# Altium PCB PCB1.PcbDoc (part 3 of 3)
Units mil, origin at the board's own origin, x right, y up, seen from the top; angles counter-clockwise.
Board outline 8343 x 1831 mil, 4 copper layers (Top Layer, VCC, GND, Bottom Layer); 375 components, 241 nets, 1575 pads, 601 vias.
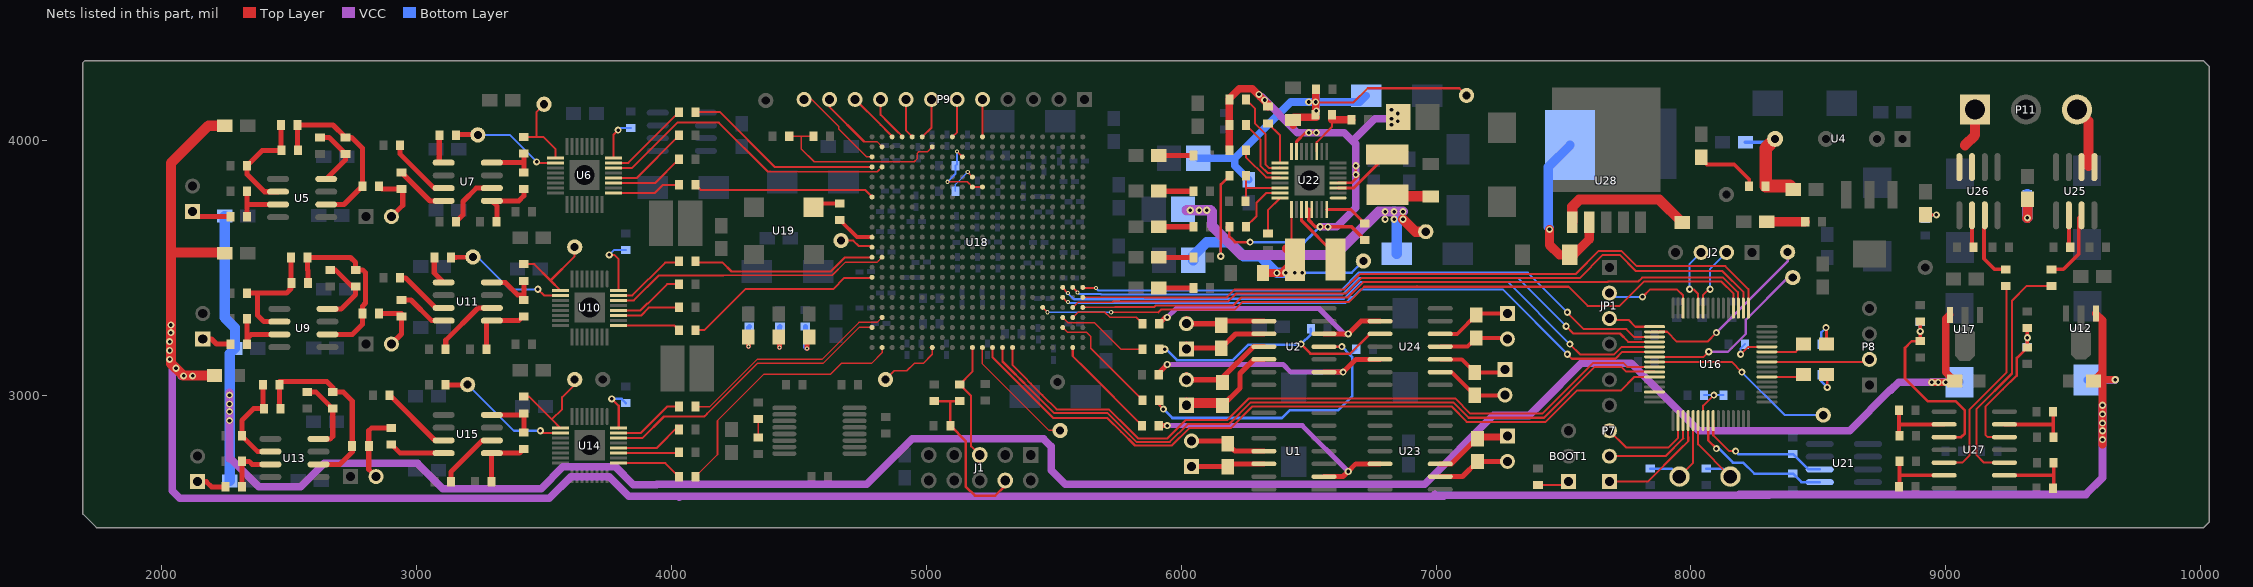
[diagram p5: the nets of this part, all layers, seen from the top]

## Via types
v1: diameter 28, hole 14, Top Layer to Bottom Layer, 286 vias
v2: diameter 16, hole 8, Top Layer to Bottom Layer, 238 vias
v3: diameter 24, hole 12, Top Layer to Bottom Layer, 70 vias
v4: diameter 196.85, hole 118.11, Top Layer to Bottom Layer, 6 vias
v5: diameter 50, hole 28, Top Layer to Bottom Layer, 1 vias

## Nets (pads, with @x,y where several pads share a name; then routed paths per layer and width w, separated by ;. In a path a pad name is that pad's centre, name@x,y a point inside that pad or via, vN(x,y) a via of type N, cw(c..) or ccw(c..) an arc to the next point about the centre after c; other vN are vias at no path point) (continued)
FPGA_TEST5: P9.5 U18.M22 | length 191.7
  Top Layer w8: U18.M22@5219.69,4013.39 5220,4013.7 5220,4085 ; 5220,4040 5220,4085 ; P9.5@5220,4160 5220,4085
FPGA_TEST6: P9.6 U18.J22 | length 154.2
  Top Layer w8: U18.J22@5101.57,4013.39 5120,4031.81 5120,4065 P9.6@5120,4160
FPGA_TEST7: P9.7 U18.F22 | length 161.7
  Top Layer w8: U18.F22@4983.46,4013.39 5020,4049.92 P9.7@5020,4160
FPGA_TEST8: P9.8 U18.E22 | length 156.6
  Top Layer w8: P9.8@4920,4160 4920,4060 4920,4037.48 U18.E22@4944.09,4013.39
FPGA_TEST9: P9.9 U18.D22 | length 234.7
  Top Layer w8: P9.9@4820,4160 4820,4100 4852.5,4067.5 ; 4890,4030 4852.5,4067.5 ; U18.D22@4904.72,4013.39 4904.72,4015.28 4852.5,4067.5
FPGA_TEST10: P9.10 U18.C22 | length 249.2
  Top Layer w8: P9.10@4720,4160 4820,4060 ; 4850,4030 4820,4060 ; U18.C22@4865.35,4013.39 4865.35,4014.65 4820,4060
FPGA_TEST11: P9.11 U18.B21 | length 300.6
  Top Layer w6: 4755,3995 4755.46,3994.54 4790,3994.54 4805.46,3994.54 U18.B21@4825.98,3974.02
  Top Layer w8: P9.11@4620,4160 4620,4130 4755,3995
FPGA_TEST12: P9.12 U18.A20 | length 368.6
  Top Layer w6: P9.12@4520,4160 4550,4160 4655,4055 4655,4045 4740,3960 4765,3935 ; 4767.77,3935 4765,3935 ; U18.A20@4786.61,3934.65 4765.35,3934.65 4765,3935
FPGA_TMS: J1.5 R76.1 U18.L1 | length 475.2
  Top Layer w8: U18.L1@5180.31,3186.61 5180.31,3091.81 R76.1@5130,3041.5 5175,2996.5 5175,2799 J1.5@5209,2765
GPS_TIMER: R103.2 U18.AA1 | length 419.5
  Top Layer w8: U18.AA1@5574.02,3186.61 5574.02,3152.52 5628.27,3098.27 R103.2@5846.54,2880
HMC5883_RDY: U16.62 | length 2.1
  Top Layer w8: U16.62@7855.69,3013.69 U16.62@7857.17,3012.21
HMC5883_SCL: P7.3 U16.2 | length 379.8
  Top Layer w8: P7.3@7680,2860 7745,2795 7912.37,2795 7949.69,2832.31 U16.2@7949.69,2900
HMC5883_SDA: P7.1 U16.4 | length 472.2
  Top Layer w8: P7.1@7680,2660 7830,2660 7955,2785 7989.06,2819.06 ; U16.4@7989.06,2900 7989.06,2819.06 ; 7990,2835 7990,2820 7989.06,2819.06
HMC5883_WSDA: P7.2 U16.3 | length 389.3
  Top Layer w8: P7.2@7680,2760 7900,2760 7970,2830 7969.37,2830.63 U16.3@7969.37,2900
JTCK: JP1.3 U16.49 | length 190.4
  Top Layer w8: JP1.3@7680,3300 7685,3295 7755,3295 7781.89,3268.11 U16.49@7857.17,3268.11
JTMS: JP1.2 U16.46 | length 367.8
  Top Layer w8: v1(7810,3385) 7840,3415 7945,3415 7969.37,3390.63 U16.46@7969.37,3340.95
  Bottom Layer w8: JP1.2@7680,3400 7695,3385 v1(7810,3385)
MAIN_DATA: R105.1 U18.AA4 | length 301.5
  Top Layer w6: U18.AA4@5574.02,3304.72 5594.29,3325 5700,3325 5720,3305 5823.5,3305 R105.1@5848.5,3280
MAIN_DATA_RXEN: R106.1 U18.Y4 | length 365.5
  Top Layer w6: U18.Y4@5534.65,3304.72 5555.17,3284.2 5659.31,3284.2 5763.51,3180 R106.1@5848.5,3180
MAIN_DATA_TXEN: R102.1 U18.Y3 | length 459.3
  Top Layer w6: U18.Y3@5534.65,3265.35 5553.49,3246.51 5628.49,3246.51 5645,3230 5645,3183.5 R102.1@5848.5,2980
MCLK_A: U6.30 U18.B19 | length 1215.2
  Top Layer w6: 4387,3876.43 4807.14,3876.43 U18.B19@4825.98,3895.28
  Top Layer w8: U6.30@3771.99,3891.31 3845,3891.31 4022.69,4069 4185.43,4069 4378,3876.43 4387,3876.43
MCLK_B: U10.30 U18.B10 | length 1114.5
  Top Layer w6: 4203,3470 4630,3470 4680.42,3520.42 4805.42,3520.42 ; 4812.64,3527.64 4805.42,3520.42 ; U18.B10@4825.94,3540.94 4805.42,3520.42
  Top Layer w8: U10.30@3791.99,3371.31 3851.77,3371.31 3950.46,3470 4203,3470
MCLK_C: U14.30 U18.A3 | length 1175.7
  Top Layer w6: 4139.24,2927.12 4336.12,3124 4594,3124 4735.35,3265.35 U18.A3@4786.61,3265.35
  Top Layer w8: U14.30@3791.99,2831.31 3885.27,2831.31 3969.96,2916 3986.63,2916 3987.61,2915.02 4127.14,2915.02 4139.24,2927.12 ; U18.A3@4786.26,3265 U18.A3@4786.61,3265.35
MCU_FPGA_BAK1: U16.54 U18.Y6 | length 2557.3
  Top Layer w8: U18.Y6@5534.65,3383.46 5553.11,3365 v2(5555,3365) ; v1(7515,3160) 7532.53,3142.47 7703.83,3142.47 7731.04,3169.69 U16.54@7857.17,3169.69
  Bottom Layer w8: v2(5555,3365) 5558,3362 5785,3362 ; 5720,3362 5785,3362 ; 6665,3375 6675,3385 ; v1(7515,3160) 7515,3161.03 7261.03,3415 6705,3415 6675,3385 ; 5785,3362 6644.88,3362 6667.88,3385 6675,3385
MCU_FPGA_BAK2: U16.51 U18.AB7 | length 2458.1
  Top Layer w8: U18.AB7@5613.39,3422.83 5616.22,3420 v2(5665,3420) ; v1(7515,3325) 7515,3323.47 7580,3258.47 7746.53,3258.47 7776.26,3228.74 U16.51@7857.17,3228.74
  Bottom Layer w8: v2(5665,3420) 5675,3410 5720,3410 5805,3410 ; 5730,3410 5805,3410 ; v1(7515,3325) 7360,3480 6695,3480 6625,3410 5805,3410
MCU_FPGA_BAK3: U16.52 U18.AA7 | length 2431
  Top Layer w8: U18.AA7@5574.02,3422.83 5592.5,3404.35 v2(5592.5,3402.5) ; v1(7510,3270) 7538.47,3241.53 7721.53,3241.53 7754,3209.06 U16.52@7857.17,3209.06
  Bottom Layer w8: v2@5590,3405 v2(5592.5,3402.5) 5599,3396 5645,3396 5685,3396 5687,3394 6631.63,3394 6697.63,3460 7320,3460 v1(7510,3270)
MCU_FPGA_BAK4: U16.53 U18.Y7 | length 2546.1
  Top Layer w8: U18.Y7@5534.65,3422.83 5534.65,3420.35 v2(5555,3400) ; v1(7525,3200) 7566.53,3158.47 7697.2,3158.47 7728.1,3189.37 U16.53@7857.17,3189.37
  Bottom Layer w8: v2@5552.5,3397.5 5550,3400 v2(5555,3400) 5579,3376 5758,3376 5760,3378 ; 5725,3378 5760,3378 ; v1(7525,3200) 7281,3444 6704.25,3444 6638.25,3378 5760,3378
MCU_FPGA_BAK5: U16.57 U18.R1 | length 2950.6
  Top Layer w8: U18.R1@5337.8,3186.61 5337.8,3117.2 5455,3000 ; 5410,3045 5455,3000 ; 5757.4,2902.6 5757.5,2902.5 ; U16.57@7857.17,3110.63 7749.37,3110.63 7733.53,3126.47 7616.22,3126.47 7416.75,2927 7134.33,2927 7074.33,2987 6265.67,2987 6180.67,2902 6018.02,2902 5946.02,2830 5830,2830 5757.5,2902.5 ; 5455,3000 5511,2944 5715.8,2944 5757.3,2902.5 5757.5,2902.5
MCU_FPGA_BAK6: U16.58 U18.P1 | length 2980.8
  Top Layer w8: U18.P1@5298.43,3186.61 5298.43,3131.57 5405,3025 ; 5365,3065 5405,3025 ; U16.58@7857.17,3090.95 7855.39,3092.72 7744.65,3092.72 7726.9,3110.47 7622.85,3110.47 7423.37,2911 7127.7,2911 7067.7,2971 6272.3,2971 6187.3,2886 6024.64,2886 5954.64,2816 5824,2816 5710,2930 5500,2930 5405,3025
MCU_FPGA_BAK7: U16.59 U18.N1 | length 2941.9
  Top Layer w8: U18.N1@5259.06,3186.61 5259.06,3147.94 5497,2910 5710,2910 5763.9,2856.1 5764.1,2856.1 5818.2,2802 5963.27,2802 6031.27,2870 6193.93,2870 6278.93,2955 7061.07,2955 7120,2896.07 7120,2895 7430,2895 7553.47,3018.47 7725.85,3018.47 7778.63,3071.26 U16.59@7857.17,3071.26
MSEL0: R79.2 U18.K20 U18.L17 U18.M17 | length 307.9
  Top Layer w6: v2(5083,3837) 5159.85,3837 U18.L17@5180.31,3816.54
  Top Layer w8: v2(5120,3955) 5140.35,3934.65 U18.K20@5140.94,3934.65 ; U18.L17@5180.31,3816.54 U18.M17@5219.69,3816.54
  Bottom Layer w8: v2(5083,3837) 5113.46,3867.46 R79.2@5113.46,3900 5120,3906.54 v2(5120,3955)
MSEL1: R81.2 U18.L18 | length 122.4
  Top Layer w6: v2(5162,3875) 5162,3874.22 U18.L18@5180.31,3855.91 U18.L18@5180.31,3855.31
  Bottom Layer w6: R81.2@5113.46,3800 5113.46,3826.46 v2(5162,3875)
NetBOOT1_1: BOOT1.1 R87.2 | length 125.6
  Top Layer w8: R87.2@7400,2646.54 7506.54,2646.54 BOOT1.1@7520,2660
NetC5_1: C5.1 R5.2 R126.2 U4.6 | length 434.6
  Top Layer w50: U4.6@8330,4005 8293.46,3968.46 R126.2@8293.46,3820 8388.06,3820 R5.2@8401.08,3806.98
  Bottom Layer w15: C5.1@8214,3991.92 8316.92,3991.92 U4.6@8330,4005
NetC10_1: C10.1 C12.1 R9.2 R21.2 U5.6 | length 714.1
  Top Layer w20: R9.2@2533.46,3960 2531.5,3961.97 C10.1@2531.5,4060 2671.5,4060 C12.1@2720,4011.5 2743.5,4011.5 2786.54,3968.46 R21.2@2786.54,3820 2714.54,3748 U5.6@2644.49,3748
NetC10_2: C10.2 R9.1 R13.2 U5.2 | length 444.6
  Top Layer w20: U5.2@2455.51,3798 2402,3798 2333.46,3866.54 R13.2@2333.46,3900 2393.46,3960 R9.1@2468.5,3960 2466.54,3961.97 C10.2@2466.54,4060
NetC11_1: C11.1 C12.2 U5.8 | length 256.7
  Top Layer w20: C11.1@2620,4011.5 2655.04,4011.5 C12.2@2720,3946.54 2720,3923.51 U5.8@2644.49,3848
NetC19_1: C19.1 C21.1 R26.2 R38.2 U9.6 | length 730.6
  Top Layer w20: R26.2@2573.46,3440 2573.46,3488.54 2571.5,3490.5 C19.1@2571.5,3540 2740,3540 2760,3520 C21.1@2760,3491.5 2787.5,3491.5 2799,3480 2799,3361.46 2786.54,3349 R38.2@2786.54,3320 2786.54,3278 2746.54,3238 U9.6@2649.49,3238
NetC19_2: C19.2 R26.1 R30.2 U9.2 | length 485.4
  Top Layer w20: R30.2@2333.46,3400 2375,3400 ; U9.2@2460.51,3288 2400,3288 2375,3313 2375,3400 ; C19.2@2506.54,3540 2506.54,3440 2506.54,3418.03 2488.5,3400 2375,3400
NetC20_1: C20.1 C21.2 U9.8 | length 292.6
  Top Layer w20: U9.8@2649.49,3338 2703,3338 2760,3395 C21.2@2760,3426.54 2744.96,3426.54 2680,3491.5 C20.1@2660,3491.5
NetC24_1: C24.1 C25.1 R60.2 R62.2 R64.2 U12.1 | length 11708.1
  Top Layer w30: C25.1@9580.08,3055.06 C25.1@9585.02,3060 ; U12.1@9589.06,3319.8 9615,3293.86 9615,3200 ; 9615,2805 9615,2995 ; v1(9615,2890) 9615,2995 ; v1(9665,3060) C25.1@9585.02,3060 ; C25.1@9585.02,3060 9615,3089.98 9615,3200 ; 9615,2995 9615,3200
  Top Layer w40: R64.2@2206.08,3076.98 2083.02,3076.98 2035,3125 2035,3560 ; R62.2@2246.08,3556.98 2243.06,3560 2035,3560 ; R60.2@2246.08,4056.98 2181.98,4056.98 2035,3910 2035,3560
  VCC w30: v1(2030,3140) 2040,3130 2040,2625 2070,2595 2360,2595 ; v1@2035,3285 2035,3230 2030,3225 2030,3125 2075,3080 2075,3075 v1(2120,3075) ; 2260,2595 2325,2595 ; 2300,2595 2325,2595 ; 4030,2600 4033,2603 4095,2603 ; 5888,2603 6040,2603 ; 6995,2610 6997.53,2607.47 7035,2607.47 ; 8190,2610 8245,2610 8310,2610 ; v1(9615,2960) 9615,2675 9550,2610 8310,2610 ; 2325,2595 2360,2595 ; 2360,2595 3520,2595 3605,2680 3755,2680 3832,2603 4095,2603 ; 4095,2603 6040,2603 ; 6040,2603 7030.53,2603 7035,2607.47 ; 7035,2607.47 7065,2607.47 7115,2607.47 8307.47,2607.47 8310,2610
  Bottom Layer w30: C24.1@9556,3059 9664,3059 v1(9665,3060)
  other v1: 9615,2825 9615,2860 9615,2925 2085,3075 2055,3105 2030,3175 2030,3210 2035,3245 2035,3275
NetC28_1: C28.1 C30.1 R43.2 R55.2 U13.6 | length 787.2
  Top Layer w20: R43.2@2464.54,2946.98 2461.5,2950.03 C28.1@2461.5,3040 2461.5,3053 2647,3053 2670,3030 C30.1@2670,3011.5 2712,3011.5 2746.54,2976.96 R55.2@2746.54,2800 2746.54,2776.54 2698,2728 U13.6@2614.49,2728
NetC28_2: C28.2 R43.1 R47.2 U13.2 | length 397.8
  Top Layer w20: C28.2@2396.54,3040 2396.54,2950.02 R43.1@2399.58,2946.98 2360,2946.98 2313.46,2900.44 R47.2@2313.46,2840 2375.46,2778 U13.2@2425.51,2778
NetC29_1: C29.1 C30.2 U13.8 | length 295.1
  Top Layer w20: C29.1@2570,3011.5 2605.04,3011.5 C30.2@2670,2946.54 2670,2838 2660,2828 U13.8@2614.49,2828
NetC34_2: C34.2 C37.2 R69.2 R71.2 R72.2 U17.3 | length 9784.2
  Top Layer w30: v1(8945,3050) 9045.02,3050 9050.08,3055.06 9034.94,3055.06 9000,3090 9000,3298.86 U17.3@9015.94,3314.8
  VCC w30: 2265,2750 v1@2265,3010 ; 2270,2750 2380,2640 2430,2640 ; 2410,2640 2430,2640 ; 5615,2650 5670,2650 ; 5910,2650 5980,2650 ; 8055,2860 8110,2860 ; v1(8945,3050) 8910,3050 ; v1(9000,3050) 8910,3050 ; 2430,2640 2545,2640 2637.53,2732.53 3002.47,2732.53 3102,2633 3488,2633 3573,2718 3779.67,2718 3849.67,2648 3940.33,2648 3942.33,2650 4765,2650 4944,2829 5385,2829 5440,2829 5459,2829 5490,2798 5490,2705 5545,2650 5670,2650 ; 5670,2650 5980,2650 ; 5980,2650 6955,2650 7225,2920 ; 7225,2920 7365,2920 ; 7225,2920 7365,2920 ; 7365,2920 7410,2965 ; 7365,2920 7410,2965 ; 7410,2965 7570,3125 7765,3125 8030,2860 8110,2860 ; 8110,2860 8622.67,2860 8782.67,3020 8785,3020 8815,3050 8910,3050
  Bottom Layer w30: v1(8945,3050) 8946,3051 C34.2@9054,3051
  Bottom Layer w40: R69.2@2246.08,3703.02 2246.08,3303.92 2286.08,3263.92 R71.2@2286.08,3183.02 2266.08,3163.02 R72.2@2266.08,2663.02
  other v1: 2265,2900 2265,2935 2265,2965 2265,3000 8970,3050
NetC41_2: C41.2 R85.2 | length 73.1
  Top Layer w6: R85.2@4340,2833.46 C41.2@4340,2906.54
NetC112_1: C112.1 J5.1 L1.2 R90.1 T19.1 U22.25 | length 1579.9
  Top Layer w8: U22.25@6432.89,3728.01 6432.89,3584.39 L1.2@6466.07,3551.21
  Top Layer w10: v1(6155,3545) 6155,3826.5 R90.1@6188.5,3860
  Top Layer w30: C112.1@6319.99,3479 v1(6375,3479) 6393.86,3479 L1.2@6446.07,3531.21 6446.07,3538.93 L1.2@6410,3575
  Bottom Layer w10: v1(6155,3545) 6155,3595 6160,3600 ; v1(6445,3480) 6668.45,3480 T19.1@6714.48,3526.03
  Bottom Layer w40: J5.1@6046.67,3529.23 6046.67,3546.67 6100,3600 6190,3600 6245,3545 6309,3545 v1(6375,3479) 6376,3480 v1@6465,3480
  other v1: 6410,3480 6475,3480
NetC113_1: C113.1 C116.1 J6.1 L2.2 T17.1 U22.1 | length 1477.3
  Top Layer w40: L2.2@6808.79,3786.07 6814.85,3780.01 C116.1@6979,3780.01 ; v1(6870,3690) 6918.97,3641.03 T17.1@6959.48,3641.03
  VCC w40: 6020,3725 6115,3725 6120,3720 6120,3665 6235,3550 6605,3550 6670,3615 6775,3720 v1(6870,3720)
  Bottom Layer w40: v1(6835,3720) 6845.43,3709.57 C113.1@6845.43,3554.64
  other v1: 6800,3690 6835,3690 6800,3720 6035,3725 6070,3725 6100,3725
NetC137_2: C137.2 C138.1 C139.1 J7.1 R96.2 R97.1 T20.1 U22.16 | length 1834.8
  Top Layer w8: v1(6527.01,4150) 6529.01,4148 6675,4148 6731,4204 7091.5,4204 T20.1@7119.48,4176.03
  Top Layer w30: C139.1@6440.98,4090 R96.2@6528.5,4090 ; R96.2@6527.01,4101.97 v1(6527.01,4150) R97.1@6527.01,4200
  Bottom Layer w30: J7.1@6066.67,3929.23 6209.23,3929.23 ; C137.2@6264.94,3844.92 6209.23,3900.64 6209.23,3929.23 ; 6525,4100 6530,4105 6530,4200 6527.01,4197.01 v1(6527.01,4150) ; C138.1@6725.43,4174.64 6700.79,4150 v1(6527.01,4150) ; 6209.23,3929.23 6430,4150 v1(6527.01,4150)
  other v1: 6530,4115 6500,4150
NetC147_2: C147.2 U25.6 | length 127.8
  Top Layer w15: U25.6@9483,3705.51 9483,3585.46 C147.2@9488.46,3580
NetC149_2: C149.2 U26.6 | length 127.8
  Top Layer w15: U26.6@9103,3705.51 9103,3585.46 C149.2@9108.46,3580
NetD1_1: D1.1 R88.1 | length 136.7
  Top Layer w20: D1.1@5911.93,3420.36 6048.14,3420.36 R88.1@6048.5,3420
NetD2_1: D2.1 R112.1 | length 138.1
  Top Layer w10: v1(8530,3265) 8531.93,3263.07 D2.1@8531.93,3200.36
  Bottom Layer w10: R112.1@8511.5,3200 8511.5,3246.5 v1(8530,3265)
NetD2_2: D2.2 U16.27 | length 156.5
  Top Layer w8: U16.27@8298.11,3169.69 8411.25,3169.69 D2.2@8441.93,3200.36
NetD3_1: D3.1 R123.1 | length 111.4
  Top Layer w10: D3.1@8531.93,3080.36 8535,3077.29 v1(8535,3030)
  Bottom Layer w10: R123.1@8511.5,3080 8511.5,3053.5 v1(8535,3030)
NetD3_2: D3.2 U16.22 | length 147.6
  Top Layer w8: U16.22@8298.11,3071.26 8432.83,3071.26 D3.2@8441.93,3080.36
NetD4_1: D4.1 R8.1 | length 166.7
  Top Layer w40: v1(9320,3695) 9320.36,3695.36 D4.1@9320.36,3768.08
  Bottom Layer w40: v1(9320,3695) R8.1@9320,3788.5
NetD5_1: D5.1 R73.1 | length 92.5
  Top Layer w12: D5.1@8920.36,3708.08 8921.44,3707 v1(8963,3707)
  Bottom Layer w12: R73.1@8920,3691.5 8935.5,3707 v1(8963,3707)
NetD6_1: D6.1 R126.1 | length 248.4
  Top Layer w15: D6.1@8040.36,3928.08 8063.44,3905 8170,3905 8228.5,3846.5 R126.1@8228.5,3820
NetD7_1: D7.1 R127.1 | length 156.7
  Top Layer w36: D7.1@8291.93,3680.36 8292.29,3680 R127.1@8448.5,3680
NetD8_2: D8.2 L3.1 U28.2 | length 695.2
  Top Layer w36: v1(7445,3650) 7445,3589 7484,3550 7540,3550 7601.21,3611.21 U28.2@7601.21,3679
  Bottom Layer w36: v1(7445,3650) 7445,3655 7440,3660 7440,3895 L3.1@7526,3981
NetD9_1: D9.1 R129.1 | length 136.9
  Top Layer w20: v2(4531,3183) 4531,3218.72 D9.1@4540.36,3228.08
  Bottom Layer w20: R129.1@4525,3268.5 4525,3189 v2(4531,3183)
NetD10_1: D10.1 R130.1 | length 126.5
  Top Layer w20: D10.1@4420.36,3228.08 4424,3224.44 v2(4424,3186)
  Bottom Layer w20: v2(4424,3186) 4424,3267.5 R130.1@4425,3268.5
NetD11_1: D11.1 R131.1 | length 116.5
  Top Layer w20: D11.1@4300.36,3228.08 4301,3227.44 v2(4301,3191)
  Bottom Layer w20: v2(4301,3191) 4301,3264.5 R131.1@4305,3268.5
NetD12_1: D12.1 R132.1 | length 136.7
  Top Layer w20: D12.1@5911.93,3540.36 5912.29,3540 R132.1@6048.5,3540
NetD13_1: D13.1 R133.1 | length 136.7
  Top Layer w20: D13.1@5911.93,3660.36 6048.14,3660.36 R133.1@6048.5,3660
NetD14_1: D14.1 R134.1 | length 136.7
  Top Layer w20: D14.1@5911.93,3800.36 5912.29,3800 R134.1@6048.5,3800
NetD15_1: D15.1 R135.1 | length 136.7
  Top Layer w20: D15.1@5911.93,3940.36 6048.14,3940.36 R135.1@6048.5,3940
NetJ1_4: J1.4 R75.2 R76.2 R77.2 | length 668.3
  Top Layer w10: R77.2@5030,2976.54 5095,2976.54 ; R76.2@5130,2976.54 5095,2976.54 ; J1.4@5309,2665 5309,2644 5270,2605 5190,2605 5155,2640 5155,2818.46 R75.2@5093.46,2880 5093.46,2975 5095,2976.54
NetJ4_2: J4.2 R89.1 R92.1 R93.1 R94.1 R95.1 R98.1 U22.4 U22.15 U22.28 U22.29 | length 3380.7
  Top Layer w10: R89.1@6188.5,3657.79 6188.5,3621.5 6210,3600 v1(6270,3600) ; U22.4@6615.76,3832.34 6667.34,3832.34 6685,3850 ; v1@6685,3910 v1(6685,3900) v1(6685,3865) 6685,3850 ; v1@6695,3860 6685,3850
  Top Layer w12: U22.15@6452.57,3956.35 6452.57,3995.44 6487.13,4030 v1(6500,4030) v1(6530,4030) ; 6500,3728.01 U22.29@6511.63,3728.01
  Top Layer w15: 6500,3728.01 6500,3686.35 6525.67,3660.67 v1(6545,3660.67) v1@6564.33,3660.67 ; v1@6565,3660 v1@6564.33,3660.67 ; R92.1@6720,3608.5 6667.83,3660.67 v1@6564.33,3660.67
  Top Layer w30: R89.1@6188.5,3657.79 R89.1@6188.5,3660 ; R93.1@6188.5,3960 R94.1@6188.5,4060 R95.1@6188.5,4160 R95.1@6188.5,4162.21 ; R95.1@6188.5,4163.5 R95.1@6188.5,4162.21 ; R98.1@6340,4131.5 6340,4140.64 6278.74,4201.9 6228.19,4201.9 R95.1@6188.5,4162.21
  VCC w20: v1(6500,4030) 6515,4030 v1(6530,4030) 6645,4030 6675,4000 ; v1(6545,3660.67) 6610.67,3660.67 6685,3735 v1(6685,3865) v1(6685,3900) 6685,3990 6675,4000 ; v1(6825,4085) 6760,4085 6675,4000
  VCC w30: v1@6310,4170 6315,4170 6455,4030 6515,4030 ; v1(6500,4030) 6640,4030 6685,3985 6685,3735 6610.67,3660.67 v1(6545,3660.67) ; 6675,4000 6745,4070 6760,4085 6840,4085
  Bottom Layer w10: v1(6270,3600) 6484.33,3600 v1(6545,3660.67) 6504.33,3620
  other v1: 6575,3660 6825,4060 6850,4075 6850,4105 6825,4120 6327.14,4157.86 6305,4180
NetL1_1: L1.1 U22.27 | length 232.8
  Top Layer w10: U22.27@6472.26,3728.01 U22.27@6473.43,3726.84
  Top Layer w12: U22.27@6472.26,3728.01 6472.26,3683.68 L1.1@6604.34,3551.61
NetL2_1: L2.1 U22.3 | length 247.2
  Top Layer w12: U22.3@6615.76,3812.65 6675,3812.65 6676.71,3812.65 L2.1@6808.39,3944.34
NetP1_1: P1.1 R1.1 U1.12 | length 288.8
  Top Layer w20: P1.1@6040,2720 6041.08,2718.92 R1.1@6181.98,2718.92 6193.06,2730 U1.12@6323.78,2730
NetP1_2: P1.2 R1.2 U1.11 | length 300.3
  Top Layer w20: P1.2@6040,2820 6170.9,2820 6210.9,2780 U1.11@6323.78,2780
NetP2_1: P2.1 R2.1 U2.12 | length 557.2
  Top Layer w20: P2.1@6020,2960 6021.08,2958.92 R2.1@6161.98,2958.92 ; P2.1@6020,2980 6021.08,2978.92 R2.1@6161.98,2978.92 ; R2.1@6160.9,2960 R2.1@6161.98,2958.92 ; U2.12@6323.78,3140 6285,3140 6230,3085 6230,3026.94 R2.1@6161.98,2958.92
NetP2_2: P2.2 R2.2 U2.11 | length 549.9
  Top Layer w20: P2.2@6020,3060 6158.56,3060 6161.98,3056.58 R2.2@6161.98,3048.92 ; P2.2@6020,3080 P2.2@6031.08,3068.92 ; U2.11@6323.78,3190 U2.11@6283.06,3190 ; U2.11@6283.06,3190 6161.98,3068.92 U2.11@6283.06,3190
NetP3_1: P3.1 R101.1 U2.10 | length 351.4
  Top Layer w20: P3.1@6020,3180 6023.92,3183.92 R101.1@6156.98,3183.92 6213.06,3240 U2.10@6323.78,3240 ; P3.1@6020,3200 P3.1@6036.08,3183.92
NetP3_2: P3.2 R101.2 U2.9 | length 327.1
  Top Layer w20: P3.2@6020,3280 6150.9,3280 R101.2@6156.98,3273.92 6173.06,3290 U2.9@6323.78,3290 ; P3.2@6020,3300 P3.2@6030,3290
NetP4_1: P4.1 R3.2 U23.10 | length 618.7
  Top Layer w15: U23.10@7016.22,2730 7060,2730 7158.92,2828.92 7268.92,2828.92 P4.1@7280,2840
  Top Layer w20: U23.10@7016.22,2730 7060,2730 7170,2840 P4.1@7280,2840
NetP4_2: P4.2 R3.1 U23.9 | length 577.3
  Top Layer w15: U23.9@7016.22,2680 7103.06,2680 7163.06,2740 P4.2@7280,2740
  Top Layer w20: U23.9@7016.22,2680 7103.06,2680 7163.06,2740 P4.2@7280,2740
NetP5_1: P5.1 R107.2 U24.12 | length 296.9
  Top Layer w15: U24.12@7016.22,3240 7083.06,3240 7163.06,3320 P5.1@7280,3320
NetP5_2: P5.2 R107.1 U24.11 | length 279.5
  Top Layer w15: U24.11@7016.22,3190 7123.06,3190 R107.1@7156.98,3223.92 7276.08,3223.92 P5.2@7280,3220
NetP6_1: P6.1 R4.2 U24.10 | length 279.5
  Top Layer w15: U24.10@7016.22,3140 7100.9,3140 R4.2@7151.98,3088.92 7258.92,3088.92 P6.1@7270,3100
NetP6_2: P6.2 R4.1 U24.9 | length 292
  Top Layer w15: U24.9@7016.22,3090 7060.9,3090 R4.1@7151.98,2998.92 7268.92,2998.92 P6.2@7270,3000
NetP11_1: P11.1 U26.3 U26.4 | length 156.6
  Top Layer w40: 9075,3980 9115,4020 P11.1@9115,4120
NetP11_3: P11.3 U25.1 U25.2 | length 238.6
  Top Layer w40: P11.3@9515,4120 9560,4075 9560,3900
NetP22_2: P22.2 R21.1 R23.1 | length 225.6
  Top Layer w20: R21.1@2851.5,3820 2863.5,3808 R23.1@2940,3808 ; P22.2@2900,3700 2945,3745 2945,3808 R23.1@2940,3808 ; R23.1@2940,3808.5 R23.1@2940,3808
NetP24_2: P24.2 R38.1 R40.1 | length 225.1
  Top Layer w20: R38.1@2851.5,3320 2940,3320 R40.1@2940,3308.5 2940,3240 P24.2@2900,3200
NetP26_2: P26.2 R55.1 R57.1 | length 285.1
  Top Layer w20: P26.2@2840,2680 2811.5,2708.5 2811.5,2728.5 R55.1@2811.5,2800 2811.5,2860 2822.99,2871.5 R57.1@2900,2871.5
NetR10_1: R10.1 R15.2 U7.1 | length 235.9
  Top Layer w20: U7.1@3294.49,3762 3314,3742.49 3314,3680 R15.2@3314,3675 ; U7.1@3314,3762 3400,3762 3420,3782 R10.1@3420,3808.5
NetR11_2: R11.2 T1.1 U6.9 | length 318.6
  Top Layer w8: R11.2@3420,4013.46 3470,4013.46 ; T1.1@3499.48,4141.03 3470,4111.55 3470,4013.46 ; U6.9@3543.65,3930.68 3543.65,3966.35 3496.54,4013.46 3470,4013.46
NetR12_2: R12.2 U7.2 | length 226.4
  Top Layer w20: R12.2@3153.46,3680 3181,3707.54 3181,3760 3233,3812 U7.2@3294.49,3812
NetR14_1: R14.1 U6.27 | length 294.9
  Top Layer w8: U6.27@3771.99,3832.26 3935.76,3832.26 R14.1@4028.5,3925
NetR16_1: R16.1 S1.1 | length 156.8
  Top Layer w20: S1.1@2120,3720 2140,3700 R16.1@2268.5,3700
NetR16_2: R16.2 R20.2 U5.3 | length 224.9
  Top Layer w20: R16.2@2333.46,3700 2333.46,3755 ; R20.2@2333.46,3800 2333.46,3755 ; U5.3@2455.51,3748 2340.46,3748 2333.46,3755
NetR17_1: R17.1 U6.28 | length 327.6
  Top Layer w8: U6.28@3771.99,3851.94 3863,3851.94 4028.5,4017.45 R17.1@4028.5,4020
NetR18_1: R18.1 U6.31 | length 339.2
  Top Layer w8: U6.31@3771.99,3911 3830,3911 4028.5,4109.5 R18.1@4028.5,4110
NetR19_1: R19.1 U6.32 | length 170.3
  Top Layer w8: U6.32@3771.99,3930.68 3771.99,4021.99 v1(3790,4040)
  Bottom Layer w8: v1(3790,4040) 3798.5,4048.5 R19.1@3840,4048.5
NetR22_1: R22.1 U6.25 | length 269.8
  Top Layer w8: U6.25@3771.99,3792.89 3887,3792.89 3933.89,3792.89 3966,3825 R22.1@4028.5,3825
NetR23_2: R23.2 U7.8 | length 211.7
  Top Layer w20: R23.2@2940,3873.46 3051.46,3762 U7.8@3105.51,3762
NetR24_2: R24.2 T2.1 U6.10 | length 438.2
  Top Layer w8: v1(3470,3915) 3474,3911 U6.10@3543.65,3911
  Top Layer w10: R24.2@3153.46,4020 R24.2@3153.46,4022
  Top Layer w20: R24.2@3153.46,4022 3238.5,4022 T2.1@3239.48,4021.03
  Bottom Layer w8: T2.1@3239.48,4021.03 3363.97,4021.03 v1(3470,3915)
NetR25_2: R25.2 U7.7 | length 261.2
  Top Layer w20: R25.2@2933.46,3980 2933.46,3946.54 3068,3812 U7.7@3105.51,3812
NetR27_1: R27.1 R32.2 U11.1 | length 267.7
  Top Layer w20: R32.2@3273.46,3180 3273,3180 3273,3292 U11.1@3294.49,3292 3400,3292 3418.25,3310.25 R27.1@3420,3312
NetR28_2: R28.2 T3.1 U10.9 | length 356.9
  Top Layer w8: R28.2@3420,3513.46 3460.87,3513.46 3524.66,3449.66 ; U10.9@3563.65,3410.68 3524.66,3449.66 ; T3.1@3619.48,3581.03 3619.48,3544.48 3524.66,3449.66
NetR29_2: R29.2 U11.2 | length 268.9
  Top Layer w20: R29.2@3113.46,3180 3113.46,3215.46 3240,3342 U11.2@3294.49,3342
NetR31_1: R31.1 U10.27 | length 250.5
  Top Layer w8: U10.27@3791.99,3312.26 3880,3312.26 3910,3342.26 3910,3343 4026.5,3343 R31.1@4028.5,3345
NetR33_1: R33.1 S2.1 | length 116.8
  Top Layer w20: S2.1@2160,3220 2194,3220 2214,3200 R33.1@2268.5,3200
NetR33_2: R33.2 R37.2 U9.3 | length 279.1
  Top Layer w20: R37.2@2333.46,3300 2334,3300 2334,3222 ; U9.3@2460.51,3238 2350,3238 ; 2334,3222 2350,3238 ; 2334,3222 2333.46,3221.46 R33.2@2333.46,3200 2334,3200 2334,3222 ; 2334,3222 2350,3238
NetR34_1: R34.1 U10.28 | length 279.2
  Top Layer w8: U10.28@3791.99,3331.94 3876.32,3331.94 3903.37,3359 3906.63,3359 3982.63,3435 R34.1@4028.5,3435
NetR35_1: R35.1 U10.31 | length 289.9
  Top Layer w8: U10.31@3791.99,3391 3846,3391 3975,3520 R35.1@4028.5,3520
NetR36_1: R36.1 U10.32 | length 239
  Top Layer w8: v1(3755,3550) 3775,3550 3791.99,3533.01 U10.32@3791.99,3410.68
  Bottom Layer w8: v1(3755,3550) 3773.5,3568.5 R36.1@3820,3568.5
NetR39_1: R39.1 U10.25 | length 243.9
  Top Layer w8: U10.25@3791.99,3272.89 4010.61,3272.89 R39.1@4028.5,3255
NetR40_2: R40.2 U11.8 | length 199.3
  Top Layer w20: R40.2@2940,3373.46 2977,3373.46 3058.46,3292 U11.8@3105.51,3292
NetR41_2: R41.2 T4.1 U10.10 | length 472.3
  Top Layer w8: v1(3475,3415) 3499,3391 U10.10@3563.65,3391
  Top Layer w20: 3153.46,3540 T4.1@3239.48,3541.03
  Bottom Layer w8: T4.1@3239.48,3541.03 3365.5,3415 v1(3475,3415)
NetR42_2: R42.2 U11.7 | length 220.9
  Top Layer w20: R42.2@2933.46,3460 2956,3460 3074,3342 U11.7@3105.51,3342
NetR44_1: R44.1 R49.2 U15.1 | length 245.8
  Top Layer w20: R49.2@3293.46,2660 U15.1@3293.46,2770.98 ; U15.1@3294.49,2770.98 U15.1@3293.46,2770.98 ; R44.1@3420,2788.5 3403.5,2772 U15.1@3294.49,2772 U15.1@3293.46,2770.98
NetR45_2: R45.2 T5.1 U14.9 | length 368.1
  Top Layer w8: R45.2@3420,2993.46 3440.87,2993.46 3529.66,2904.66 ; U14.9@3563.65,2870.68 3529.66,2904.66 ; T5.1@3619.48,3041.03 3570,2991.55 3570,2945 3529.66,2904.66
NetR46_2: R46.2 U15.2 | length 250.7
  Top Layer w20: R46.2@3133.46,2660 3133.46,2698.46 3257,2822 U15.2@3294.49,2822
NetR48_1: R48.1 U14.27 | length 237.6
  Top Layer w8: U14.27@3791.99,2772.26 4025.76,2772.26 R48.1@4028.5,2775
NetR50_1: R50.1 S3.1 | length 116.8
  Top Layer w20: S3.1@2140,2660 2174,2660 2194,2640 R50.1@2248.5,2640
NetR50_2: R50.2 R54.2 U13.3 | length 217
  Top Layer w20: R50.2@2313.46,2640 R54.2@2313.46,2740 2342,2740 2354,2728 U13.3@2425.51,2728
NetR51_1: R51.1 U14.28 | length 273
  Top Layer w8: U14.28@3791.99,2791.94 3940.45,2791.94 R51.1@4028.5,2880
NetR52_1: R52.1 U14.31 | length 279.6
  Top Layer w8: U14.31@3791.99,2851 3879.5,2851 3983.5,2955 R52.1@4028.5,2955
NetR53_1: R53.1 U14.32 | length 187.3
  Top Layer w10: v1(3765,2985) 3791.99,2958.01 U14.32@3791.99,2870.68
  Bottom Layer w10: v1(3765,2985) 3803.5,2985 R53.1@3820,2968.5
NetR56_1: R56.1 U14.25 | length 258.4
  Top Layer w8: U14.25@3791.99,2732.89 3975.61,2732.89 R56.1@4028.5,2680
NetR57_2: R57.2 U15.8 | length 219.8
  Top Layer w20: R57.2@2900,2806.54 2934.54,2772 U15.8@3105.51,2772
NetR58_2: R58.2 T6.1 U14.10 | length 528.9
  Top Layer w8: v1(3485,2860) 3494,2851 U14.10@3563.65,2851
  Top Layer w20: R58.2@3113.46,3040 T6.1@3199.48,3040
  Bottom Layer w8: T6.1@3199.48,3041.03 3380.5,2860 v1(3485,2860)
NetR59_2: R59.2 U15.7 | length 285.8
  Top Layer w20: R59.2@2893.46,3000 3071.46,2822 U15.7@3105.51,2822
NetR66_1: R66.1 U16.28 | length 162.1
  Top Layer w8: v1(8195,3160) 8224.37,3189.37 U16.28@8298.11,3189.37
  Bottom Layer w8: v1(8195,3160) 8195,3183.5 R66.1@8211.5,3200
NetR74_1: R74.1 U19.3 | length 108.7
  Top Layer w15: U19.3@4557.37,3736.9 4571.97,3751.5 R74.1@4660,3751.5
NetR74_2: R74.2 U18.A12 | length 154.3
  Top Layer w15: R74.2@4660,3686.54 4726.85,3619.69 U18.A12@4786.61,3619.69
NetR89_2: R89.2 U22.23 | length 220.7
  Top Layer w8: R89.2@6253.46,3660 6295,3701.54 6295,3755 6332.97,3792.97 U22.23@6387.81,3792.97
NetR92_2: R92.2 U22.32 | length 171.9
  Top Layer w12: U22.32@6570.68,3728.01 6665.46,3728.01 R92.2@6720,3673.46
NetR93_2: R93.2 U22.20 | length 194.4
  Top Layer w8: R93.2@6253.46,3960 6253.46,3933.91 6333.18,3854.2 6385.64,3854.2 U22.20@6387.81,3852.02
NetR94_2: R94.2 U22.19 | length 272.9
  Top Layer w8: R94.2@6253.46,4060 6310,4003.46 6310,3900 6338.29,3871.71 U22.19@6387.81,3871.71
NetR95_2: R95.2 U22.18 | length 373.2
  Top Layer w8: R95.2@6253.46,4160 6290,4123.46 6290,4064.92 6330,4024.92 6330,3905 ; 6330,3925 6330,3905 ; U22.18@6385.64,3893.57 U22.18@6387.81,3891.39 6343.61,3891.39 6330,3905
NetR96_1: R96.1 R99.1 U22.11 | length 225.6
  Top Layer w8: U22.11@6531.31,3956.35 6531.31,3992.61 6591.5,4052.8 6591.5,4080
  Top Layer w30: 6591.5,4080 R99.1@6668.5,4080
NetR98_2: R98.2 U22.17 | length 175.3
  Top Layer w8: R98.2@6340,4066.54 6387.81,4018.73 U22.17@6387.81,3911.08
NetR100_2: R100.2 U22.24 | length 159.6
  Top Layer w8: R100.2@6340,3633.46 6340,3725.47 U22.24@6387.81,3773.28
NetR102_2: R102.2 R124.2 U2.4 | length 1146.5
  Top Layer w10: R102.2@5913.46,2980 5913.46,2961.54 v1(5930,2945) ; U2.4@6560,3190 v1(6630,3190)
  Bottom Layer w10: v1(5930,2945) 5965,2910 6395,2910 6425,2940 6615,2940 6670,2995 6670,3150 6662.5,3157.5 ; v1(6630,3190) 6662.5,3157.5 ; R124.2@6686.54,3180 6685,3180 6662.5,3157.5
NetR103_1: R103.1 U1.2 U23.5 | length 1058.8
  Top Layer w20: R103.1@5911.5,2880 v1(5945,2880) ; U1.2@6560,2680 6635,2680 v1(6655,2700) 6685,2730 U23.5@6780,2730
  VCC w20: v1(5945,2880) 6475,2880 v1(6655,2700)
NetR104_1: R104.1 U2.2 U24.5 | length 997
  Top Layer w20: R104.1@5911.5,3080 5911.5,3086.5 v1(5945,3120) ; U2.2@6560,3090 v1(6635,3090) 6685,3140 U24.5@6780,3140
  VCC w20: v1(5945,3120) 6399.75,3120 6429.75,3090 v1(6635,3090)
NetR105_2: R105.2 U2.5 U24.2 | length 1048.5
  Top Layer w20: R105.2@5913.46,3280 5938.46,3305 v1(5945,3305) ; U2.5@6560,3240 v1(6655,3240) 6705,3290 U24.2@6780,3290
  VCC w20: v1(5945,3305) 5980,3340 6539.94,3340 6639.94,3240 v1(6655,3240)
NetR106_2: R106.2 R125.1 U24.3 | length 1025.4
  Top Layer w10: R106.2@5913.46,3180 v1(5935,3180) ; v1(6470,3200) 6507,3163 6663,3163 6740,3240 U24.3@6780,3240
  Bottom Layer w10: v1@5940,3180 5982.53,3137.47 6202.47,3137.47 6263,3198 v1@6468,3198 ; v1(6470,3200) 6508.5,3238.5 R125.1@6508.5,3260
NetR108_2: R108.2 U25.7 | length 288.1
  Top Layer w15: R108.2@9415,3493.46 9461.32,3493.46 9521.71,3553.85 9521.71,3694.22 U25.7@9533,3705.51
NetR109_2: R109.2 U26.7 | length 273.7
  Top Layer w15: U26.7@9153,3705.51 9150.26,3702.77 9150.26,3534.74 9191.54,3493.46 R109.2@9235,3493.46
NetR115_2: R115.2 R116.1 U27.2 | length 294.3
  Top Layer w15: U27.2@9230,2685 9423.46,2685 ; R116.1@9421.5,2635 9423.46,2636.97 9423.46,2685 ; R115.2@9423.46,2735 9423.46,2685
NetR117_2: R117.2 R118.1 U27.13 | length 276.1
  Top Layer w15: R117.2@8816.54,2640 8818.5,2641.97 8818.5,2685 ; R118.1@8818.5,2740 8818.5,2685 ; U27.13@8993.78,2685 8818.5,2685
NetR119_2: R119.2 R120.1 U27.6 | length 292.3
  Top Layer w15: U27.6@9230,2885 9421.5,2885 ; R120.1@9421.5,2935 9421.5,2885 ; R119.2@9423.46,2835 9421.5,2836.97 9421.5,2885
NetR121_2: R121.2 R122.1 U27.9 | length 280.1
  Top Layer w15: R121.2@8816.54,2940 8816.54,2890 ; R122.1@8818.5,2840 8816.54,2841.97 8816.54,2890 ; U27.9@8993.78,2885 8821.54,2885 8816.54,2890
NetR128_2: R128.2 U28.1 | length 540.8
  Top Layer w40: U28.1@7534.28,3679 7534.28,3739.28 7561.91,3766.91 7876.14,3766.91 R128.2@7966.08,3676.98
NetT8_1: T8.1 U16.55 | length 703.4
  Top Layer w8: U16.55@7857.17,3150 8005,3150 8050,3150 v1(8070,3170)
  VCC w10: v1(8070,3170) 8145,3170 8215,3240 8215,3295 8381.03,3461.03 T8.1@8399.48,3461.03
NetT10_1: T10.1 U16.56 | length 749
  Top Layer w8: U16.56@7857.17,3130.32 8159.68,3130.32 v1(8200,3090)
  Bottom Layer w8: v1(8200,3090) 8368.97,2921.03 T10.1@8519.48,2921.03
NetT12_1: T12.1 U18.G1 | length 287.5
  Top Layer w6: T12.1@4819.48,3041.03 4873.45,3095 4923.03,3095 4949.78,3121.75 4952.03,3124 4987,3124 5022.83,3159.83 U18.G1@5022.83,3186.61 U18.G1@5014.64,3186.61
NetT13_1: T13.1 U16.50 | length 705
  Top Layer w8: U16.50@7857.17,3248.43 7906.57,3248.43 7945,3210 8065,3210 v1(8100,3245)
  VCC w10: v1(8100,3245) 8379.48,3524.48 T13.1@8379.48,3561.03
NetT14_1: T14.1 U18.A11 | length 132.8
  Top Layer w8: T14.1@4664.48,3606.03 4712.93,3606.03 4733.96,3585 4781.93,3585 U18.A11@4786.61,3580.32
NetT16_1: T16.1 U18.M1 | length 477.3
  Top Layer w6: U18.M1@5219.69,3186.61 5219.69,3122.31 5480.97,2861.03 T16.1@5524.48,2861.03
OUT1+: R10.2 R11.1 U7.4 | length 200.6
  Top Layer w20: U7.4@3294.49,3912 3420,3912 ; R10.2@3420,3873.46 3420,3912 ; R11.1@3420,3948.5 3420,3912
OUT1-: R24.1 U7.5 | length 126
  Top Layer w10: U7.5@3088,3912 U7.5@3105.51,3912
  Top Layer w20: U7.5@3088,3912 3088,4020 R24.1@3088.5,4020
OUT2+: R27.2 R28.1 U11.4 | length 247.2
  Top Layer w20: U11.4@3294.49,3442 3347,3442 3395.54,3393.46 3420,3393.46 3420,3420 ; R27.2@3420,3373.46 R28.1@3420,3448.5
OUT2-: R41.1 U11.5 | length 113.3
  Top Layer w20: R41.1@3068.5,3540 3068.5,3479.01 U11.5@3105.51,3442
OUT3+: R44.2 R45.1 U15.4 | length 298.8
  Top Layer w20: 3371.46,2922 U15.4@3294.49,2922 3417,2922 R45.1@3420,2925 ; 3420,2873.46 R44.2@3420,2853.46 R45.1@3420,2925 ; R45.1@3420,2928.5 R45.1@3420,2925
REF_V2: R90.2 R91.1 U22.22 | length 236.3
  Top Layer w8: R91.1@6251.5,3760 6253.46,3761.97 6253.46,3810 ; R90.2@6253.46,3860 6253.46,3810 ; U22.22@6387.81,3812.65 6256.12,3812.65 6253.46,3810
RESET_FPGA: C156.2 R136.1 U18.G21 | length 733.8
  Top Layer w6: R136.1@4461.5,4015 C156.2@4556.54,4015 ; 4508,4015 4508,3967 4559.2,3915.8 4674,3915.8 ; 4655.73,3915.8 4674,3915.8 ; U18.G21@5022.83,3974.02 5003.82,3955 4970,3955 4962.94,3947.94 4962.94,3926.84 4951.9,3915.8 4674,3915.8
RST: C47.1 R67.1 U16.7 | length 194.4
  Top Layer w8: U16.7@8048.11,2900 8048.11,2958.11 v1(8090,3000)
  Bottom Layer w8: C47.1@8051.5,3000 R67.1@8128.5,3000
RX1: J2.3 U16.43 | length 265.3
  Top Layer w8: v1@7995,3420 v1(7995,3415) 8010,3415 8028.43,3396.57 U16.43@8028.43,3340.95
  Bottom Layer w8: v1(7995,3415) 7995,3515 J2.3@8040,3560
SCL: R70.1 U16.9 U21.6 | length 531.2
  Top Layer w8: 8087.48,2842.52 8150,2780 v1(8175,2780)
  Top Layer w10: 8087.48,2842.52 U16.9@8087.48,2900
  Bottom Layer w10: v1(8175,2780) 8186.5,2768.5 R70.1@8400,2768.5 8460.5,2708 U21.6@8505.51,2708
SCLK_1A: R18.2 U18.A19 | length 867.3
  Top Layer w8: R18.2@4093.46,4110 4190,4110 4405,3895 4518,3895 4675,3895 ; 4760,3895 4675,3895 ; U18.A19@4786.61,3895.28 4786.34,3895 4675,3895
SCLK_2A: R35.2 U18.A10 | length 810.8
  Top Layer w8: R35.2@4093.46,3520 4200,3520 4235,3485 4625,3485 4680,3540 ; 4760,3540 4680,3540 ; U18.A10@4786.61,3540.94 4785.67,3540 4680,3540
SCLK_3A: R52.2 U18.B4 | length 877.4
  Top Layer w6: R52.2@4093.46,2955 4150.15,2955 4335.15,3140 4590.2,3140 4735.2,3285 4806.26,3285 U18.B4@4825.98,3304.72
SDA: R86.1 U16.8 U21.5 | length 583.5
  Top Layer w10: U16.8@8067.8,2900 8067.8,2822.2 v1(8100,2790)
  Bottom Layer w10: v1(8100,2790) 8110,2790 8165,2735 8205,2735 8248.5,2691.5 R86.1@8400,2691.5 8433.5,2658 U21.5@8505.51,2658
SPI1_MISO: U16.35 U18.AB5 | length 2756.3
  Top Layer w6: U18.AB5@5613.39,3344.09 5614.29,3345 5685,3345 ; 5635,3345 5685,3345 ; 5740,3345 5685,3345
  Top Layer w8: 5740,3345 5893,3345 5899.36,3351.36 6203.36,3351.36 6235,3383 6653.25,3383 6713.25,3443 7673,3443 7675,3445 7792.37,3445 7808.37,3461 8126.63,3461 8184.13,3403.5 8184.13,3342.73 U16.35@8185.91,3340.95
SPI1_MOSI: U16.36 U18.V5 | length 2922.1
  Top Layer w6: U18.V5@5455.91,3344.09 v2(5475,3325) ; v2(5725,3325) 5910,3325
  Top Layer w8: 5910,3325 5920.36,3335.36 6140.36,3335.36 ; 6140,3335 6140.36,3335.36 ; 6237.31,3362.69 6240.63,3366 ; 6925,3427 6927,3425 ; U16.36@8166.22,3340.95 8166.22,3398.78 8120,3445 7815,3445 7720,3350 7595,3350 7520,3425 6927,3425 ; 6140.36,3335.36 6209.99,3335.36 6240.63,3366 ; 6240.63,3366 6658.88,3366 6717.88,3425 6927,3425
  Bottom Layer w6: v2@5470,3330 v2(5475,3325) 5555,3325 v2(5725,3325)
SPI1_NSS: U16.33 U18.AB6 | length 3021.1
  Top Layer w6: U18.AB6@5613.39,3383.46 5613.49,3383.36 5700,3383.36 5855,3383.36
  Top Layer w8: 5855,3383.36 6178.36,3383.36 6210,3415 6640,3415 6700,3475 7440,3475 ; 7275,3475 7440,3475 ; 7793.37,3506 7825,3506 ; U16.33@8225.28,3340.95 8225.28,3415.55 8134.82,3506 7825,3506 ; 7440,3475 7547.37,3475 7638.37,3566 7726.63,3566 7786.63,3506 7825,3506
SPI1_SCK: U16.34 U18.AA5 | length 2893.2
  Top Layer w6: U18.AA5@5574.02,3344.09 5574.09,3344.09 5594.62,3364.62 ; 5587.38,3357.38 5594.62,3364.62 ; 5730,3364.36 5615.26,3364.36 5615,3364.62 5594.62,3364.62
  Top Layer w8: 5730,3364.36 5733,3367.36 6184.99,3367.36 6216.63,3399 6646.63,3399 6706.63,3459 7562.97,3459 7653.97,3550 7720,3550 7783,3487 7845,3487 ; 7803,3487 7845,3487 ; U16.34@8205.59,3340.95 8205.59,3404.66 8123.25,3487 7845,3487
SYNC_1A: R22.2 U18.A16 | length 713
  Top Layer w8: R22.2@4093.46,3825 4113.46,3805 4758.78,3805 U18.A16@4786.61,3777.17
SYNC_2A: R39.2 U18.A8 | length 826.3
  Top Layer w8: R39.2@4093.46,3255 4128.46,3255 4234.23,3360.77 ; 4250,3376.54 4234.23,3360.77 ; 4750,3460 4725,3460 ; U18.A8@4786.61,3462.2 4784.41,3460 4725,3460 ; 4234.23,3360.77 4289.46,3416 4633.98,3416 4677.98,3460 4725,3460
SYNC_3A: R56.2 U18.B1 | length 1032.6
  Top Layer w6: R56.2@4093.46,2680 4180,2766.53 4180,2900 4361,3081 4622,3081 4665.24,3124.24 4784.24,3124.24 4825.98,3165.98 U18.B1@4825.98,3186.61
TEST_I+: R108.1 U27.3 | length 974.6
  Top Layer w8: 9160,2735 9150,2735 ; U27.3@9230,2735 9150,2735 ; R108.1@9415,3428.5 9318.5,3428.5 9260,3370 9260,3084.54 9120,2944.54 9120,2830 9120,2765 9150,2735
TEST_I-: R109.1 U27.12 | length 838.5
  Top Layer w8: U27.12@8993.78,2735 9065,2735 9094,2764 9094,2944 9239,3089 9239,3424.5 R109.1@9235,3428.5
TEST_V+: C151.2 R110.1 R111.1 U27.5 | length 603.4
  Top Layer w8: U27.5@9230,2835 9165,2835 9155,2845 9155,2954.09 9170.46,2969.54 9222.96,3022.04 9224.37,3022.04 9279,3076.67
  Top Layer w10: 9279,3076.67 9279,3145.5 R111.1@9320,3186.5
  Top Layer w15: R111.1@9320,3186.5 v1(9320,3225) R110.1@9320,3263.5
  Bottom Layer w15: C151.2@9320,3188.46 v1(9320,3225)
TEST_V-: C152.2 R113.1 R114.1 U27.10 | length 797
  Top Layer w10: R113.1@8900,3211.5 8866.5,3211.5 8840,3185 8840,3065 8895,3010 ; 8905,3000 8895,3010 ; U27.10@8993.78,2835 9060,2835 9075,2850 ; 9065,2840 9075,2850 ; 8895,3010 8930,2975 9040,2975 9075,2940 9075,2885 9075,2850
  Top Layer w15: R113.1@8900,3211.5 v1(8900,3250) R114.1@8900,3288.5
  Bottom Layer w15: v1(8900,3250) C152.2@8900,3286.54
TMP_DATA: P8.2 U16.25 | length 405.9
  Top Layer w8: U16.25@8298.11,3130.32 8690.32,3130.32 P8.2@8700,3140
TX1: J2.2 U16.42 | length 267.1
  Top Layer w8: U16.42@8048.11,3340.95 8048.11,3393.11 8075,3420 v1(8075,3415)
  Bottom Layer w8: v1(8075,3415) 8075,3495 J2.2@8140,3560
X1: C58.1 U16.5 Y1.2 | length 370.1
  Top Layer w8: Y1.2@7955.02,2680.17 8008.74,2733.88 U16.5@8008.74,2900
  Bottom Layer w10: C58.1@7840,2711.5 7923.69,2711.5 Y1.2@7955.02,2680.17
X2: C59.1 U16.6 Y1.1 | length 380.3
  Top Layer w8: U16.6@8028.43,2900 8028.43,2806.76 Y1.1@8155.02,2680.17
  Bottom Layer w10: C59.1@8060,2711.5 8123.69,2711.5 Y1.1@8155.02,2680.17
pads on no net: J1.7 J1.8 P8.3 U1.4 U1.5 U1.8 U1.9 U1.10 U1.13 U2.8 U2.13 U5.1 U5.5 U6.1 U6.2 U6.3 U6.4 U6.8 U6.15 U6.16 U6.20 U6.29 U8.1 U8.3 U8.5 U8.7 U8.8 U9.1 U9.5 U10.1 U10.2 U10.3 U10.4 U10.8 U10.15 U10.16 U10.20 U10.29 U13.1 U13.5 U14.1 U14.2 U14.3 U14.4 U14.8 U14.15 U14.16 U14.20 U14.29 U16.10 U16.11 U16.20 U16.21 U16.23 U16.24 U16.26 U16.29 U16.30 U16.37 U16.38 U16.39 U16.40 U16.41 U16.44 U16.45 U16.61 U18.A7 U18.A13 U18.A14 U18.A15 U18.AA3 U18.AA6 U18.AA8 U18.AA9 U18.AA10 U18.AA11 U18.AA12 U18.AA13 U18.AA14 U18.AA15 U18.AA16 U18.AA17 U18.AA18 U18.AA19 U18.AA20 U18.AA21 U18.AB4 U18.AB9 U18.AB11 U18.AB12 U18.AB14 U18.AB15 U18.AB17 U18.AB19 U18.B5 U18.B6 U18.B7 U18.B8 U18.B11 U18.B12 U18.B13 U18.B14 U18.B15 U18.B16 U18.B17 U18.B18 U18.B20 U18.B22 U18.C1 U18.C2 U18.C3 U18.C4 U18.C6 U18.C7 U18.C8 U18.C10 U18.C13 U18.C15 U18.C17 U18.C18 U18.C19 U18.C20 U18.C21 U18.D1 U18.D2 U18.D6 U18.D7 U18.D8 U18.D10 U18.D13 U18.D15 U18.D17 U18.D18 U18.D19 U18.D20 U18.D21 U18.E1 U18.E3 U18.E4 U18.E5 U18.E6 U18.E7 U18.E8 U18.E9 U18.E11 U18.E12 U18.E13 U18.E14 U18.E15 U18.E16 U18.E21 U18.F1 U18.F2 U18.F7 U18.F8 U18.F9 U18.F10 U18.F11 U18.F13 U18.F14 U18.F15 U18.F17 U18.F19 U18.F20 U18.F21 U18.G3 U18.G4 U18.G5 U18.G7 U18.G18 U18.G22 U18.H1 U18.H2 U18.H3 U18.H4 U18.H5 U18.H7 U18.H17 U18.H18 U18.H19 U18.H20 U18.H21 U18.H22 U18.J1 U18.J2 U18.J3 U18.J4 U18.J5 U18.J6 U18.J18 U18.J19 U18.J20 U18.J21 U18.K18 U18.K19 U18.K21 U18.K22 U18.L6 U18.L21 U18.L22 U18.M2 U18.M3 U18.M4 U18.M5 U18.M6 U18.M16 U18.M19 U18.M20 U18.M21 U18.N2 U18.N5 U18.N6 U18.N18 U18.N19 U18.N20 U18.N21 U18.N22 U18.P2 U18.P3 U18.P4 U18.P5 U18.P20 U18.P21 U18.P22 U18.R2 U18.R3 U18.R4 U18.R5 U18.R14 U18.R16 U18.R17 U18.R18 U18.R19 U18.R20 U18.R21 U18.T1 U18.T2 U18.T3 U18.T4 U18.T5 U18.T15 U18.T16 U18.T17 U18.T18 U18.T19 U18.T20 U18.T21 U18.T22 U18.U1 U18.U2 U18.U9 U18.U10 U18.U11 U18.U12 U18.U14 U18.U15 U18.U16 U18.U17 U18.U19 U18.U20 U18.U21 U18.V1 U18.V2 U18.V3 U18.V4 U18.V8 U18.V9 U18.V10 U18.V11 U18.V12 U18.V13 U18.V14 U18.V15 U18.V16 U18.V21 U18.V22 U18.W1 U18.W2 U18.W6 U18.W7 U18.W8 U18.W10 U18.W13 U18.W14 U18.W15 U18.W17 U18.W19 U18.W20 U18.W21 U18.W22 U18.Y1 U18.Y2 U18.Y8 U18.Y10 U18.Y13 U18.Y14 U18.Y15 U18.Y17 U18.Y21 U19.1 U20.3 U20.4 U20.5 U20.6 U20.11 U20.12 U20.13 U20.14 U22.5 U22.6 U22.8 U22.9 U22.10 U22.12 U22.14 U22.21 U22.30 U23.2 U23.3 U23.8 U23.11 U23.12 U23.13 U24.8 U24.13 U28.0
copper on no net: | length 761.7
  Top Layer w8: 3771.99,3871.63 3835,3871.63 ; 3791.99,2811.63 3856,2811.63 ; 3791.99,3351.63 3857.54,3351.63 3950.91,3445 3970,3445 ; 3891.63,2811.63 3856,2811.63 ; 3896.28,3914.28 3853.63,3871.63 ; 3955,2856 3910.63,2811.63 3856,2811.63 ; 3972,3990 3853.63,3871.63 ; 3835,3871.63 3853.63,3871.63 ; 3835,3871.63 3853.63,3871.63
  other v4: 9800,2705 1885,2745 5651,2782 1905,4060 9807,4094 5897,4109

## Polygon pours and split planes (outlines as drawn)
DGND on GND "Bottom Layer-No Net" (solid, pour order 1000): 9694,4222 9694,4140 9694,2572 9692,2570 4206,2570 4191,2585 4191,4236 4195,4240 4233,4240 9676,4240 9694,4222
AGND on GND "Bottom Layer-No Net" (solid, pour order 1001): 4180,4236 4180,3800 4173,3793 4172,3792 4101,3792 4020,3792 4010,3782 4010,3752 4010,3214 4017,3207 4051,3207 4054,3204 4056,3202 4056,3194 4056,2576 4050,2570 2007,2570 1984,2593 1987,2596 1987,2652 1987,2668 2031,2712 2023,2720 2023,2840 2023,2843 1965,2901 1881,2985 1881,3890 1888,3890 1933,3935 1985,3935 2037,3987 2051,4001 2051,4163 2051,4173 2102,4224 2118,4240 2227,4240 4176,4240 4180,4236
DGND on GND "Bottom Layer-No Net" (solid, pour order 1002): 4191,3770.97 4030.97,3770.97 4022,3762 4023,3761 4023,3710 4023,3224 4028,3219 4031,3216 4059,3216 4062,3216 4068,3210 4069,3209 4069,3172 4069,2584 4076,2577 4078.37,2579.37 4196.63,2579.37 4206,2588.74 4206,2598 4206,3763.58 4191,3778.58 4190.42,3778 4034,3778 4022,3778 4022,3762
AGND on VCC "Bottom Layer-No Net" (solid, pour order 1003): 2106,4231 2051,4176 2051,4051 2051,4002 1956,3907 1889,3840 1889,3383 1889,3372 1930,3331 1933,3328 2047,3328 2060,3328 2091,3297 2097,3291 2097,3155 2097,3148 2141,3104 2191,3054 2281,3054 2290,3054 2342,3002 2345,2999 2345,2841 2345,2753 2394,2704 2413,2685 2518,2685 2518,2688 2571,2741 2590,2760 2882,2760 3051,2760 3131,2680 3139,2672 3396,2672 3456,2672 3521,2737 3547,2763 3818,2763 3847,2763 3897,2713 3899,2711 4046,2711 4046,3532 4011,3567 4010,3568 4010,3820 4010,4155 3937,4228 2109,4228 2106,4231
DGND on VCC "Bottom Layer-No Net" (solid, pour order 1004): 9692,4223 9692,3018 9670,2996 9667,2993 9564,2993 9564,2709 9507,2652 9502,2647 9191,2647 8871,2647 8829,2689 8822,2696 8822,3193 8822,4195 8849,4222 8863,4236 9009,4236 9679,4236 9692,4223

## Keep-outs
Keep-Out Layer:
  lines w8: 1745,2560 1745,4250 9730,4250 9980,4250 9985,4245 9985,4240 9985,2560 1745,2560

## Other copper
Top Layer:
  rectangle net NetC113_1: 6775,3675 6895,3780
  rectangle net NetJ4_2: 6490,3695 6510,3750
  rectangle net NetC137_2: 6415,3935 6435,4075
  rectangle net NetC113_1: 6600,3745 6885,3775
  rectangle net NetC112_1: 6395,3465 6430,3745
  rectangle net +5V_D: 6950,4055 7145,4130
  rectangle net NetP11_1: 9050,3850 9105,4005
  rectangle net -12V: 9140,3835 9215,3950
  rectangle net +12V: 9420,3840 9490,3970
  rectangle net NetP11_3: 9525,3840 9590,3975
  rectangle net -12V: 9075,3145 9225,3260
  rectangle net +12V: 9425,3880 9500,4040
  rectangle net +12V: 9395,3290 9475,3385
VCC:
  rectangle net NetC113_1: 6785,3680 6895,3730
  rectangle net NetJ4_2: 6805,4050 6865,4140
  rectangle net +5V_D: 8515,3785 8595,3860
  rectangle net +3.3V: 5689,3480 5790,3528
Bottom Layer:
  rectangle net NetC113_1: 6000,3695 6135,3750
  rectangle net -12V: 9140,3910 9215,4000
  rectangle net -12V: 9050,3140 9220,3260
  rectangle net +12V: 9485,3915 9605,4040
  rectangle net +12V: 9420,3960 9525,4040
  rectangle net +12V: 9400,3280 9485,3380
  rectangle net +1.2V: 5729,3713 5939,3745

## Silkscreen, mask and mechanical layers (free items; w line width, h text height)
Top Overlay:
  text "-12V" at 8950,4188 h40 r270
  text "2.5V" at 7177,4178 h25
  text "GND" at 4245,4145 h25
  text "B21" at 4605,4075 h25
  text "D22" at 4789,4075 h25
  text "C22" at 4697,4074 h25
  text "AB20" at 5626,4074 h25
  text "E22" at 4894,4073 h25
  text "A20" at 4488,4072 h25
  text "F22" at 4992,4072 h25
  text "J22" at 5088,4072 h25
  text "M22" at 5191,4071 h25
  text "U22" at 5377,4071 h25
  text "Y22" at 5484,4071 h25
  text "R22" at 5288,4070 h25
  text "+12V" at 9678,4052 h40 r90
  text "SGND" at 9318,3982 h25
  text "AGND" at 2024,3873 h25 r270
  text "+IN1" at 2023,3749 h25 r270
  text "GND" at 8194,3748 h25
  text "1.2V" at 7031,3632 h25
  text "+3.3V" at 8838,3545 h25 r270
  text "A11" at 4648,3525 h25
  text "+3.3V" at 6768,3519 h25
  text "AGND" at 2068,3385 h25 r270
  text "JTMS" at 7508,3375 h25
  text "JTCK" at 7525,3283 h25
  text "+IN2" at 2067,3255 h25 r270
  text "GND" at 7554,3182 h25
  text "AGND" at 3787,3063 h25
  text "DHT" at 8798,3049 h30 r90
  text "GND" at 5387,3031 h25
  text "G1" at 4885,3002 h25
  text "M1" at 5450,2911 h25
  text "WZY V2.0 2018.01.01" at 1968,2874 h60 r90
  text "AGND" at 2033,2819 h25 r270
  text "HMC5883" at 7778,2751 h25 r90
  text "+IN3" at 2032,2698 h25 r270